# Altium PCB POWR0011_BCR_PROTOTYPE.PcbDoc (part 1 of 2)
Units mil, origin at the board's own origin, x right, y up, seen from the top; angles counter-clockwise.
Board outline 7874.02 x 3346.46 mil, 4 copper layers (Top Layer, Internal Plane 1, Internal Plane 2, Bottom Layer); 193 components, 127 nets, 685 pads, 316 vias.
Unrouted connection lines stored in the file: 1.
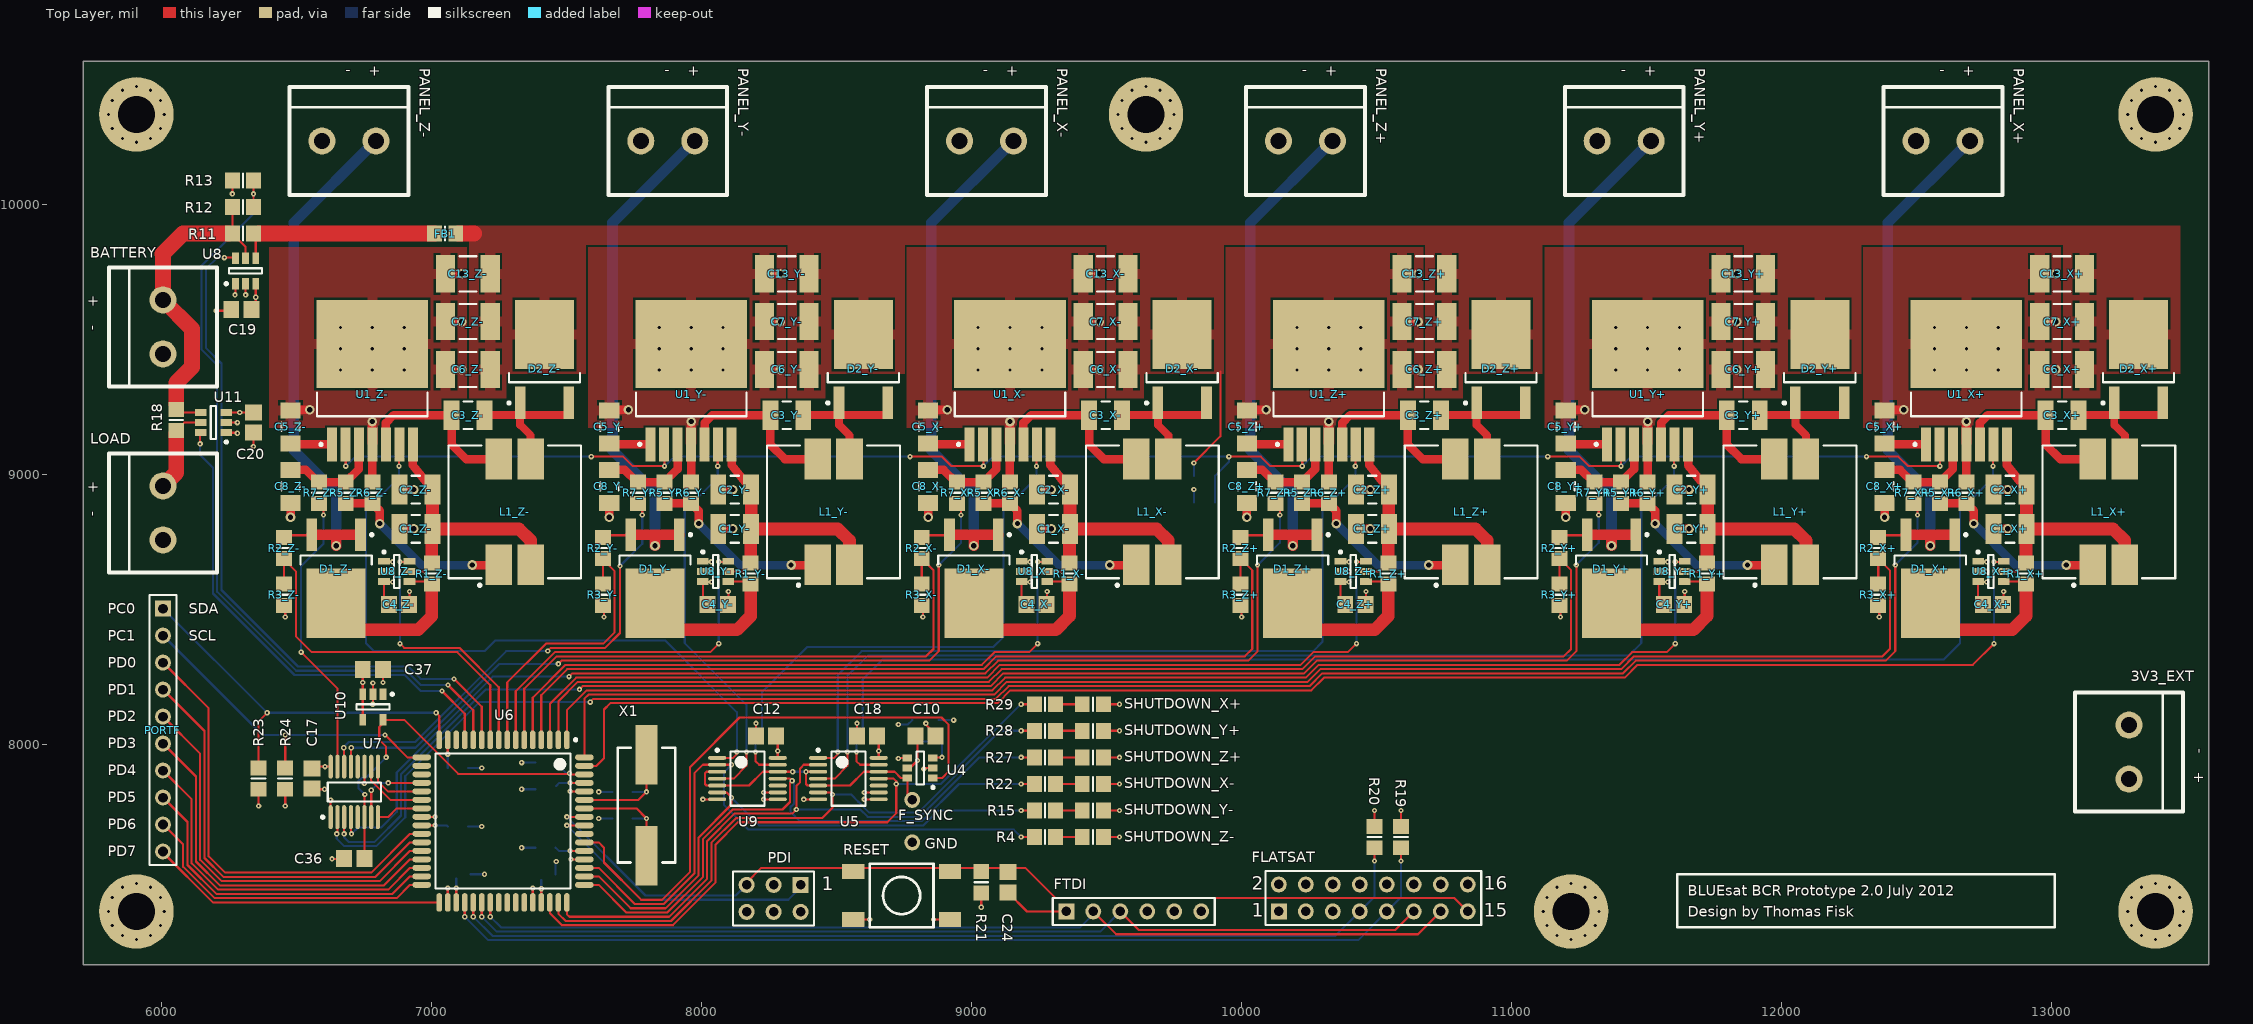
[diagram p0: Top Layer view]
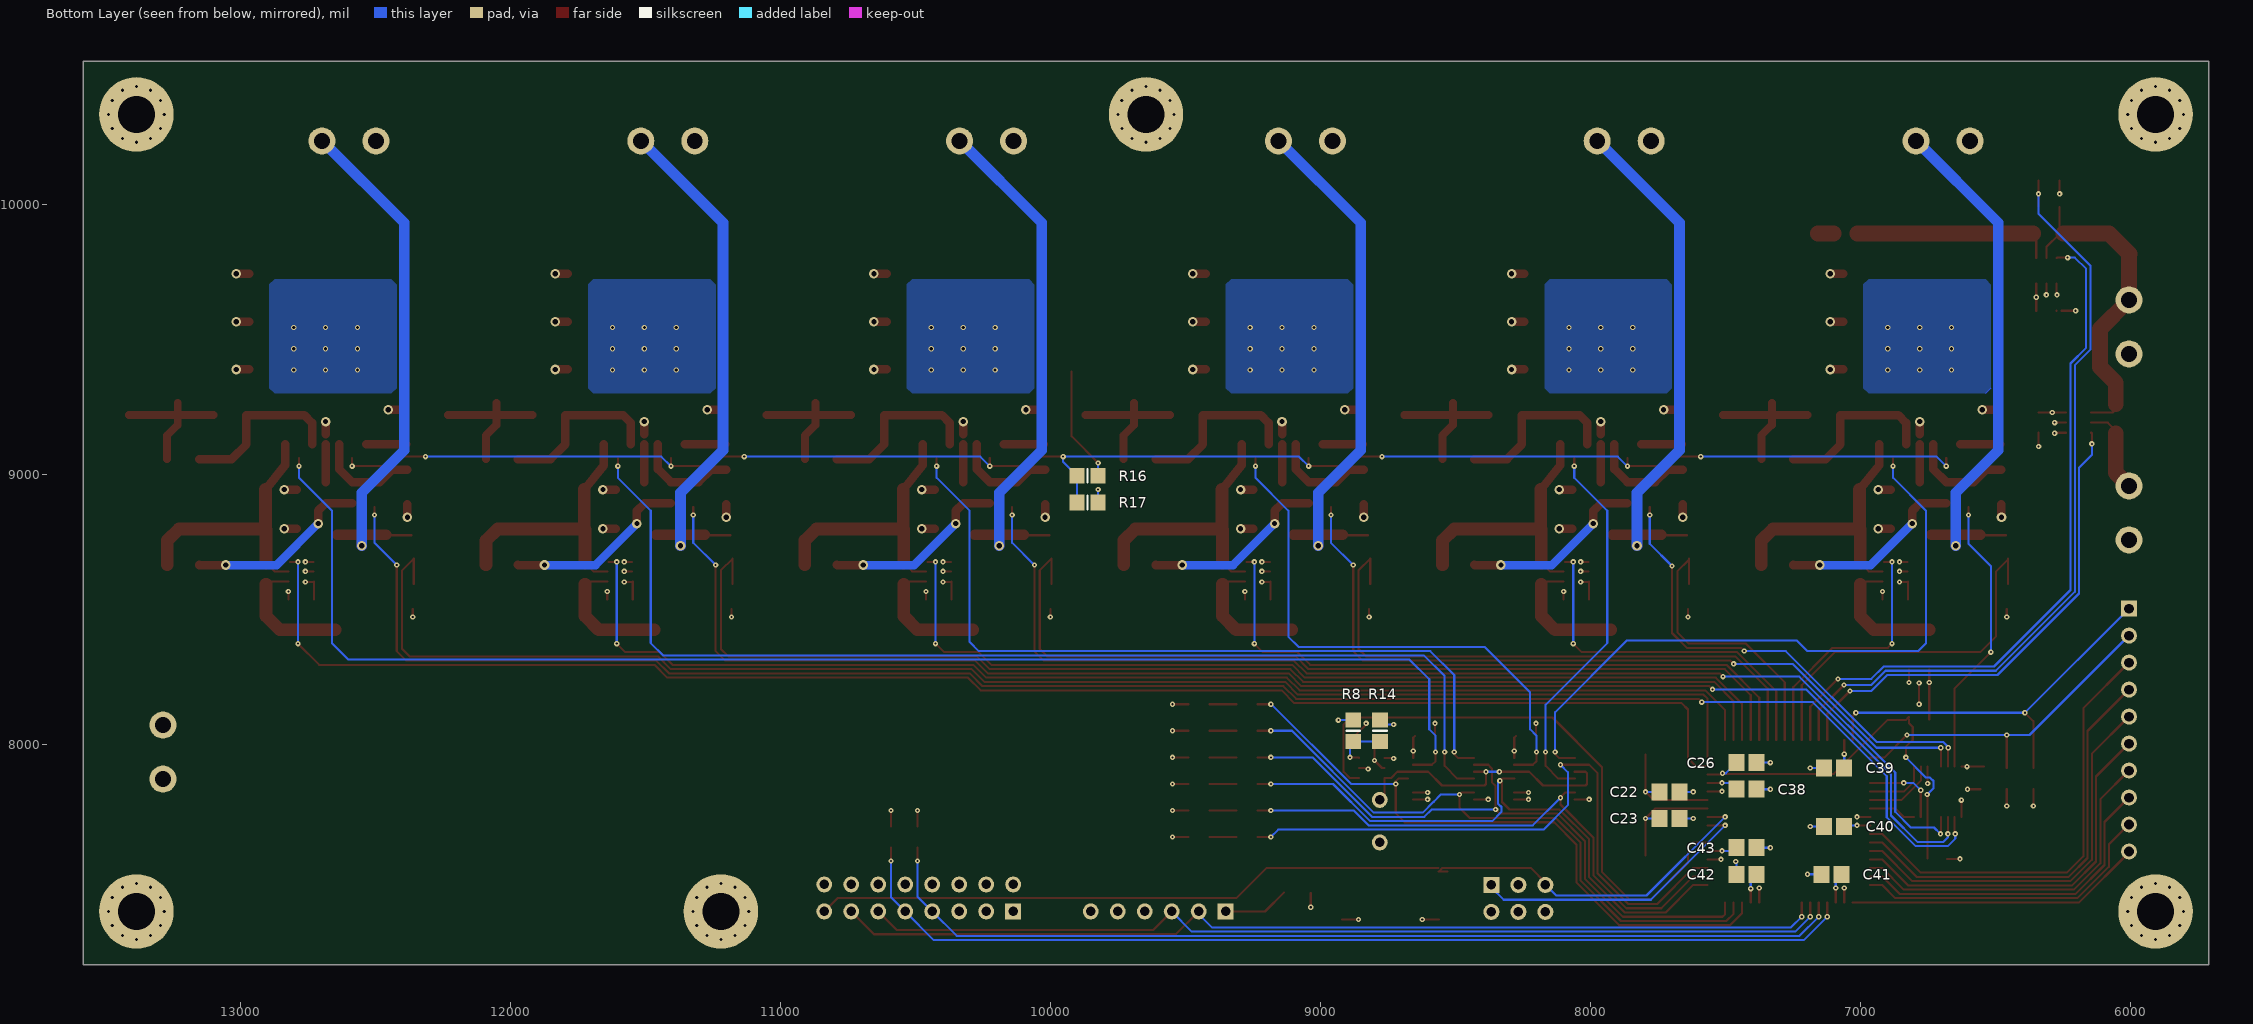
[diagram p1: Bottom Layer view, seen from below]
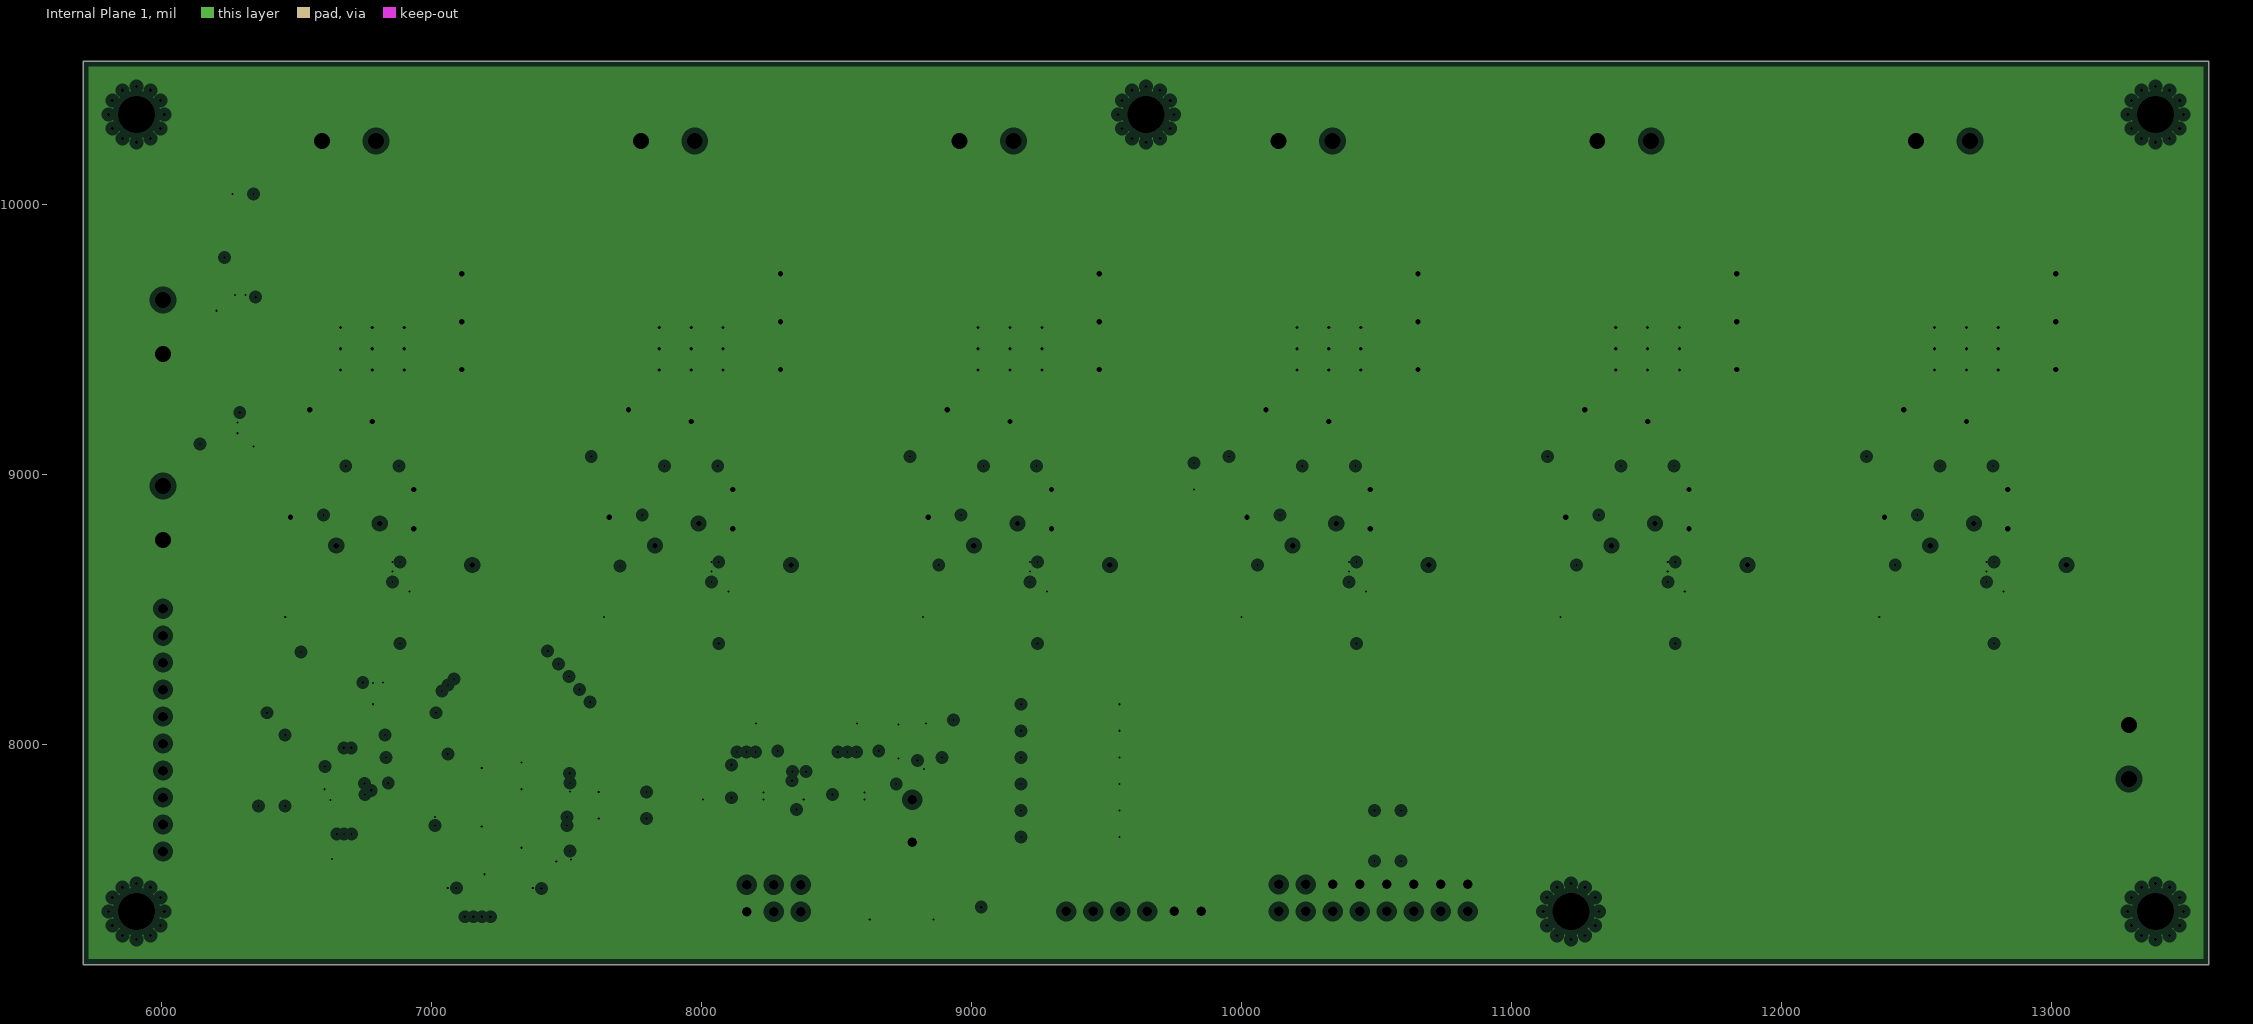
[diagram p2: Internal Plane 1, clearances drawn from the general rule]
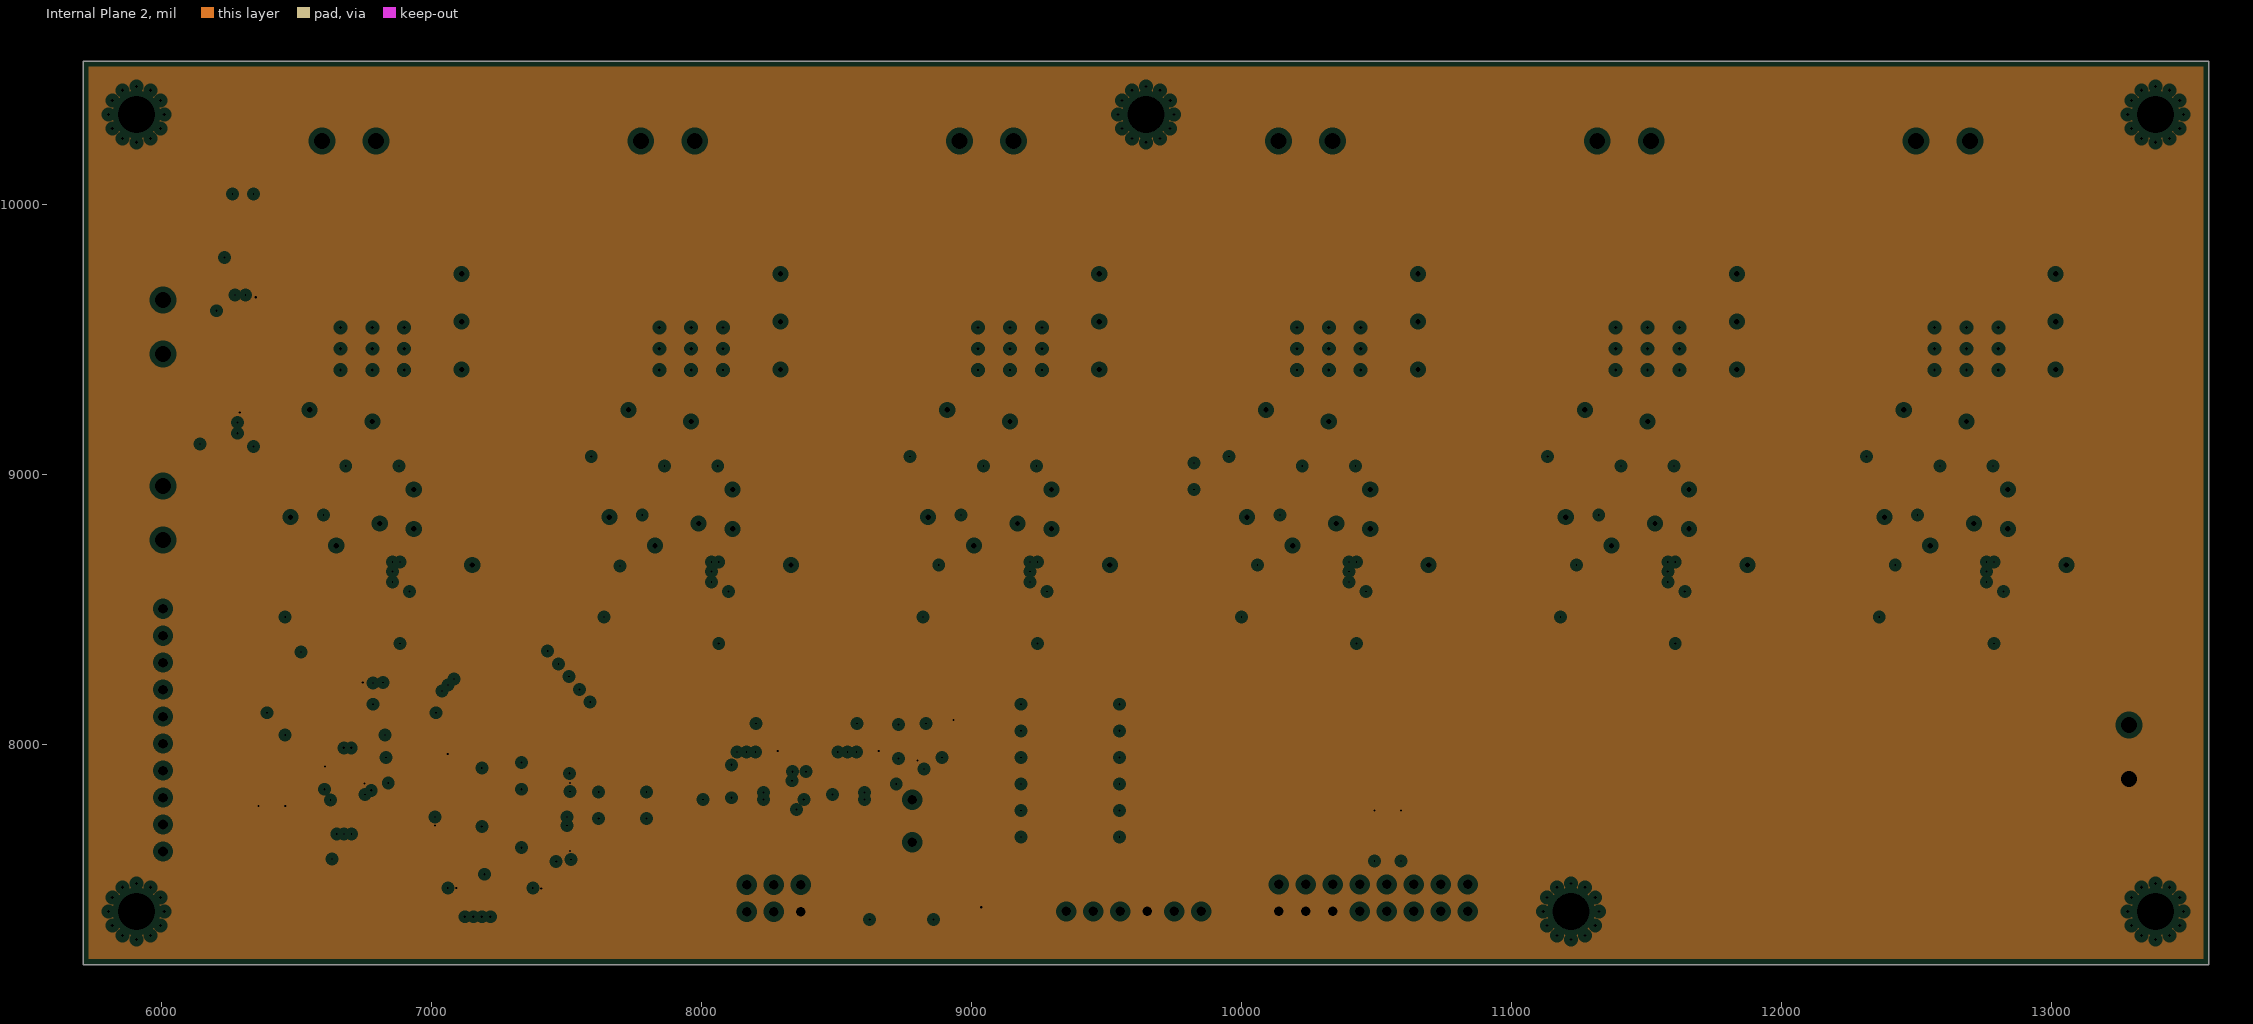
[diagram p3: Internal Plane 2, clearances drawn from the general rule]

## Layer stack, top to bottom
Top Layer: signal copper 1.4
Dielectric: core 12.6, FR-4, Dk 4.8
Internal Plane 1: plane copper 1.4, net GND
Dielectric: prepreg 12.6, FR-4, Dk 4.8
Internal Plane 2: plane copper 1.4, net 3V3
Dielectric: core 12.6, FR-4, Dk 4.8
Bottom Layer: signal copper 1.4

## Board outline
5708.66,10531.5 5708.66,7185.04 13582.68,7185.04 13582.68,10531.5

## Design rules (kind name [scope] priority, off if disabled: settings)
AssemblyTestPointUsage [All] p1 off:
AssemblyTestpoint [All] p1 off: testpointundercomponent=TRUE minsize=40 maxsize=100 preferedsize=60 minholesize=0 maxholesize=40 preferedholesize=32 testpointgrid=1 usegrid=TRUE gridtolerance=0.01 allowsidetop=TRUE allowsidebottom=TRUE
Clearance [All] p1: gap=7.87
FabricationTestPointUsage [All] p1 off: valid=0 allowmultiple=FALSE
FabricationTestpoint [All] p1 off: side=3 testpointundercomponent=TRUE minsize=40 maxsize=100 preferedsize=60 minholesize=0 maxholesize=40 preferedholesize=32 testpointgrid=1 allowsidetop=TRUE allowsidebottom=TRUE usegrid=TRUE gridtolerance=0.01
HoleSize [All] p1 off: absolutevalues=TRUE maxlimit=100 minlimit=1 maxpercent=80.000 minpercent=20.000
MinimumSolderMaskSliver [All] p1 off: minsoldermaskwidth=10
PlaneClearance [All] p1: clearance=20
PlaneConnect PlaneConnect_1 [IsVia] p1: planeconnectstyle=Direct reliefexpansion=20 reliefentries=4 reliefconductorwidth=10 reliefairgap=10
PlaneConnect [All] p2: planeconnectstyle=Relief reliefexpansion=20 reliefentries=4 reliefconductorwidth=10 reliefairgap=10
PolygonConnect PolygonConnect_1 [IsVia] p1: connectstyle=Direct reliefconductorwidth=10 reliefentries=4 polygonreliefangle="90 Angle"
PolygonConnect [All] p2: connectstyle=Relief reliefconductorwidth=39.37 reliefentries=4 polygonreliefangle="90 Angle"
RoomDefinition X+ [InComponentClass('X+')] p1: confinementstyle=ConfineIn formatcopy=TRUE lockcomponents=FALSE outline 12303.15,8366.14 13484.25,8366.14 13484.25,9842.52 12303.15,9842.52
RoomDefinition Y- [InComponentClass('Y-')] p2: confinementstyle=ConfineIn formatcopy=TRUE lockcomponents=FALSE outline 7578.74,8366.14 8759.84,8366.14 8759.84,9842.52 7578.74,9842.52
RoomDefinition Z- [InComponentClass('Z-')] p3: confinementstyle=ConfineIn formatcopy=TRUE lockcomponents=FALSE outline 6397.64,8366.14 7578.74,8366.14 7578.74,9842.52 6397.64,9842.52
RoomDefinition Z+ [InComponentClass('Z+')] p4: confinementstyle=ConfineIn formatcopy=TRUE lockcomponents=FALSE outline 9940.94,8366.14 11122.05,8366.14 11122.05,9842.52 9940.94,9842.52
RoomDefinition Y+ [InComponentClass('Y+')] p5: confinementstyle=ConfineIn formatcopy=TRUE lockcomponents=FALSE outline 11122.05,8366.14 12303.15,8366.14 12303.15,9842.52 11122.05,9842.52
RoomDefinition X- [InComponentClass('X-')] p6: confinementstyle=ConfineIn formatcopy=TRUE lockcomponents=FALSE outline 8759.84,8366.14 9940.94,8366.14 9940.94,9842.52 8759.84,9842.52
RoutingVias [All] p1: holewidth=7.87 width=13.78 viastyle="Through Hole" minholewidth=3.94 minwidth=3.94 maxholewidth=28 maxwidth=50
SilkToSilkClearance [All] p1 off: silktosilkclearance=10
SilkscreenOverComponentPads [All] p1 off: minsilkscreentomaskgap=10
SolderMaskExpansion [All] p1: expansion=4
Width [All] p1: maxlimit=157.48 minlimit=7.87 preferedwidth=7.87
18 further rules are at their usual default settings.

## Classes and differential pairs
component class U_POWR0008_BCR_System: C10 C12 C17 C18 C19 C20 C22 C23 C26 C36 C37 C38 C39 C40 C41 C42 C43 FB1 R8 R11 R12 R13 R14 R16 R17 R18 R19 R20 R23 R24 U4 U5 U6 U7 U8 U9 U10 U11 X1
component class POWR0010_BCR_TESTBOARD: 3V3_EXT BATTERY C24 FLATSAT FTDI LOAD PANEL_X+ PANEL_X- PANEL_Y+ PANEL_Y- PANEL_Z+ PANEL_Z- PORTF R4 R15 R21 R22 R27 R28 R29 RESET SHUTDOWN_X+ SHUTDOWN_X- SHUTDOWN_Y+ SHUTDOWN_Y- SHUTDOWN_Z+ SHUTDOWN_Z-
channel class POWR0001_BCR_LT1513: X+ X- Y+ Y- Z+ Z-
component class Z-: C1_Z- C2_Z- C3_Z- C4_Z- C5_Z- C6_Z- C7_Z- C8_Z- C13_Z- D1_Z- D2_Z- L1_Z- R1_Z- R2_Z- R3_Z- R5_Z- R6_Z- R7_Z- U1_Z- U8_Z-
component class Z+: C1_Z+ C2_Z+ C3_Z+ C4_Z+ C5_Z+ C6_Z+ C7_Z+ C8_Z+ C13_Z+ D1_Z+ D2_Z+ L1_Z+ R1_Z+ R2_Z+ R3_Z+ R5_Z+ R6_Z+ R7_Z+ U1_Z+ U8_Z+
component class Y-: C1_Y- C2_Y- C3_Y- C4_Y- C5_Y- C6_Y- C7_Y- C8_Y- C13_Y- D1_Y- D2_Y- L1_Y- R1_Y- R2_Y- R3_Y- R5_Y- R6_Y- R7_Y- U1_Y- U8_Y-
component class Y+: C1_Y+ C2_Y+ C3_Y+ C4_Y+ C5_Y+ C6_Y+ C7_Y+ C8_Y+ C13_Y+ D1_Y+ D2_Y+ L1_Y+ R1_Y+ R2_Y+ R3_Y+ R5_Y+ R6_Y+ R7_Y+ U1_Y+ U8_Y+
component class X-: C1_X- C2_X- C3_X- C4_X- C5_X- C6_X- C7_X- C8_X- C13_X- D1_X- D2_X- L1_X- R1_X- R2_X- R3_X- R5_X- R6_X- R7_X- U1_X- U8_X-
component class X+: C1_X+ C2_X+ C3_X+ C4_X+ C5_X+ C6_X+ C7_X+ C8_X+ C13_X+ D1_X+ D2_X+ L1_X+ R1_X+ R2_X+ R3_X+ R5_X+ R6_X+ R7_X+ U1_X+ U8_X+

## Components (designator, comment, footprint, x,y, rotation, side; value= is the part's Value field where it differs from the comment)
3V3_EXT "Screw Terminal" SCREW2 13287.4,7972.44 r90 top
BATTERY "Screw Terminal" SCREW2 6003.94,9547.24 r270 top
C1_X+ "Cap" CAPC3225M 12846.46,8799.21 r180 top (schematic designator C1)
C1_X- "Cap" CAPC3225M 9303.15,8799.21 r180 top (schematic designator C1)
C1_Y+ "Cap" CAPC3225M 11665.35,8799.21 r180 top (schematic designator C1)
C1_Y- "Cap" CAPC3225M 8122.05,8799.21 r180 top (schematic designator C1)
C1_Z+ "Cap" CAPC3225M 10484.25,8799.21 r180 top (schematic designator C1)
C1_Z- "Cap" CAPC3225M 6940.94,8799.21 r180 top (schematic designator C1)
C2_X+ "Cap" CAPC3225M 12846.46,8944.88 r180 top (schematic designator C2)
C2_X- "Cap" CAPC3225M 9303.15,8944.88 r180 top (schematic designator C2)
C2_Y+ "Cap" CAPC3225M 11665.35,8944.88 r180 top (schematic designator C2)
C2_Y- "Cap" CAPC3225M 8122.05,8944.88 r180 top (schematic designator C2)
C2_Z+ "Cap" CAPC3225M 10484.25,8944.88 r180 top (schematic designator C2)
C2_Z- "Cap" CAPC3225M 6940.94,8944.88 r180 top (schematic designator C2)
C3_X+ "Cap" CAPC3225M 13039.37,9220.47 r180 top (schematic designator C3)
C3_X- "Cap" CAPC3225M 9496.06,9220.47 r180 top (schematic designator C3)
C3_Y+ "Cap" CAPC3225M 11858.27,9220.47 r180 top (schematic designator C3)
C3_Y- "Cap" CAPC3225M 8314.96,9220.47 r180 top (schematic designator C3)
C3_Z+ "Cap" CAPC3225M 10677.17,9220.47 r180 top (schematic designator C3)
C3_Z- "Cap" CAPC3225M 7133.86,9220.47 r180 top (schematic designator C3)
C4_X+ "Cap" CAPC2012M 12783.46,8519.68 r0 top (schematic designator C4)
C4_X- "Cap" CAPC2012M 9240.16,8519.68 r0 top (schematic designator C4)
C4_Y+ "Cap" CAPC2012M 11602.36,8519.68 r0 top (schematic designator C4)
C4_Y- "Cap" CAPC2012M 8059.06,8519.68 r0 top (schematic designator C4)
C4_Z+ "Cap" CAPC2012M 10421.26,8519.68 r0 top (schematic designator C4)
C4_Z- "Cap" CAPC2012M 6877.95,8519.68 r0 top (schematic designator C4)
C5_X+ "Cap" CAPC3216M 12381.89,9177.17 r90 top (schematic designator C5)
C5_X- "Cap" CAPC3216M 8838.58,9177.17 r90 top (schematic designator C5)
C5_Y+ "Cap" CAPC3216M 11200.79,9177.17 r90 top (schematic designator C5)
C5_Y- "Cap" CAPC3216M 7657.48,9177.17 r90 top (schematic designator C5)
C5_Z+ "Cap" CAPC3216M 10019.69,9177.17 r90 top (schematic designator C5)
C5_Z- "Cap" CAPC3216M 6476.38,9177.17 r90 top (schematic designator C5)
C6_X+ "Cap" CAPC4532M 13039.37,9389.76 r180 top (schematic designator C6)
C6_X- "Cap" CAPC4532M 9496.06,9389.76 r180 top (schematic designator C6)
C6_Y+ "Cap" CAPC4532M 11858.27,9389.76 r180 top (schematic designator C6)
C6_Y- "Cap" CAPC4532M 8314.96,9389.76 r180 top (schematic designator C6)
C6_Z+ "Cap" CAPC4532M 10677.17,9389.76 r180 top (schematic designator C6)
C6_Z- "Cap" CAPC4532M 7133.86,9389.76 r180 top (schematic designator C6)
C7_X+ "Cap" CAPC4532M 13039.37,9566.93 r180 top (schematic designator C7)
C7_X- "Cap" CAPC4532M 9496.06,9566.93 r180 top (schematic designator C7)
C7_Y+ "Cap" CAPC4532M 11858.27,9566.93 r180 top (schematic designator C7)
C7_Y- "Cap" CAPC4532M 8314.96,9566.93 r180 top (schematic designator C7)
C7_Z+ "Cap" CAPC4532M 10677.17,9566.93 r180 top (schematic designator C7)
C7_Z- "Cap" CAPC4532M 7133.86,9566.93 r180 top (schematic designator C7)
C8_X+ "Cap" CAPC3216M 12381.89,8956.69 r90 top (schematic designator C8)
C8_X- "Cap" CAPC3216M 8838.58,8956.69 r90 top (schematic designator C8)
C8_Y+ "Cap" CAPC3216M 11200.79,8956.69 r90 top (schematic designator C8)
C8_Y- "Cap" CAPC3216M 7657.48,8956.69 r90 top (schematic designator C8)
C8_Z+ "Cap" CAPC3216M 10019.69,8956.69 r90 top (schematic designator C8)
C8_Z- "Cap" CAPC3216M 6476.38,8956.69 r90 top (schematic designator C8)
C10 "Cap" CAPC2012M 8828.74,8031.5 r0 top
C12 "Cap" CAPC2012M 8238.19,8031.5 r0 top
C13_X+ "Cap" CAPC4532M 13039.37,9744.09 r180 top (schematic designator C13)
C13_X- "Cap" CAPC4532M 9496.06,9744.09 r180 top (schematic designator C13)
C13_Y+ "Cap" CAPC4532M 11858.27,9744.09 r180 top (schematic designator C13)
C13_Y- "Cap" CAPC4532M 8314.96,9744.09 r180 top (schematic designator C13)
C13_Z+ "Cap" CAPC4532M 10677.17,9744.09 r180 top (schematic designator C13)
C13_Z- "Cap" CAPC4532M 7133.86,9744.09 r180 top (schematic designator C13)
C17 "Cap" CAPC2012M 6555.12,7874.02 r90 top
C18 "Cap" CAPC2012M 8612.2,8031.5 r0 top
C19 "Cap" CAPC2012M 6294.29,9612.2 r180 top
C20 "Cap" CAPC2012M 6338.58,9192.91 r270 top
C22 "Cap" CAPC2012M 7706.69,7824.8 r0 bottom
C23 "Cap" CAPC2012M 7706.69,7726.38 r180 bottom
C24 "Cap" CAPC2012M 9133.86,7490.16 r90 top
C26 "Cap" CAPC2012M 7421.26,7933.07 r0 bottom
C36 "Cap" CAPC2012M 6712.6,7578.74 r0 top
C37 "Cap" CAPC2012M 6781.5,8277.56 r180 top
C38 "Cap" CAPC2012M 7421.26,7834.65 r0 bottom
C39 "Cap" CAPC2012M 7096.46,7913.39 r180 bottom
C40 "Cap" CAPC2012M 7096.46,7696.85 r180 bottom
C41 "Cap" CAPC2012M 7106.3,7519.69 r180 bottom
C42 "Cap" CAPC2012M 7421.26,7519.69 r180 bottom
C43 "Cap" CAPC2012M 7421.26,7618.11 r0 bottom
D1_X+ "MBRD340G" TO229P990X238-3N 12551.18,8618.11 r270 top (schematic designator D1)
D1_X- "MBRD340G" TO229P990X238-3N 9007.87,8618.11 r270 top (schematic designator D1)
D1_Y+ "MBRD340G" TO229P990X238-3N 11370.08,8618.11 r270 top (schematic designator D1)
D1_Y- "MBRD340G" TO229P990X238-3N 7826.77,8618.11 r270 top (schematic designator D1)
D1_Z+ "MBRD340G" TO229P990X238-3N 10188.98,8618.11 r270 top (schematic designator D1)
D1_Z- "MBRD340G" TO229P990X238-3N 6645.67,8618.11 r270 top (schematic designator D1)
D2_X+ "MBRD340G" TO229P990X238-3N 13322.83,9425.2 r90 top (schematic designator D2)
D2_X- "MBRD340G" TO229P990X238-3N 9779.53,9425.2 r90 top (schematic designator D2)
D2_Y+ "MBRD340G" TO229P990X238-3N 12141.73,9425.2 r90 top (schematic designator D2)
D2_Y- "MBRD340G" TO229P990X238-3N 8598.43,9425.2 r90 top (schematic designator D2)
D2_Z+ "MBRD340G" TO229P990X238-3N 10960.63,9425.2 r90 top (schematic designator D2)
D2_Z- "MBRD340G" TO229P990X238-3N 7417.32,9425.2 r90 top (schematic designator D2)
FB1 "Res2" RESC2012M 7049.21,9892.72 r180 top
FLATSAT "Header 8X2" HDR2X8 10137.8,7381.89 r0 top
FTDI "Header 6" HDR1X6 9350.39,7381.89 r0 top
L1_X+ "DRQ125 Dual Inductor" DRQ125 13212.6,8862.2 r90 top (schematic designator L1)
L1_X- "DRQ125 Dual Inductor" DRQ125 9669.29,8862.2 r90 top (schematic designator L1)
L1_Y+ "DRQ125 Dual Inductor" DRQ125 12031.5,8862.2 r90 top (schematic designator L1)
L1_Y- "DRQ125 Dual Inductor" DRQ125 8488.19,8862.2 r90 top (schematic designator L1)
L1_Z+ "DRQ125 Dual Inductor" DRQ125 10850.39,8862.2 r90 top (schematic designator L1)
L1_Z- "DRQ125 Dual Inductor" DRQ125 7307.09,8862.2 r90 top (schematic designator L1)
LOAD "Screw Terminal" SCREW2 6003.94,8858.27 r270 top
PANEL_X+ "Solar Panel Connector" SCREW2 12598.43,10236.22 r180 top
PANEL_X- "Solar Panel Connector" SCREW2 9055.12,10236.22 r180 top
PANEL_Y+ "Solar Panel Connector" SCREW2 11417.32,10236.22 r180 top
PANEL_Y- "Solar Panel Connector" SCREW2 7874.02,10236.22 r180 top
PANEL_Z+ "Solar Panel Connector" SCREW2 10236.22,10236.22 r180 top
PANEL_Z- "Solar Panel Connector" SCREW2 6692.91,10236.22 r180 top
PDI "Header 3X2" HDR2X3 8366.14,7480.31 r180 top (schematic designator ICSP)
PORTF "Header 10" HDR1X10 6003.94,8503.94 r270 top
R1_X+ "Res1" RESC2012M 12905.51,8633.86 r270 top (schematic designator R1)
R1_X- "Res1" RESC2012M 9362.2,8633.86 r270 top (schematic designator R1)
R1_Y+ "Res1" RESC2012M 11724.41,8633.86 r270 top (schematic designator R1)
R1_Y- "Res1" RESC2012M 8181.1,8633.86 r270 top (schematic designator R1)
R1_Z+ "Res1" RESC2012M 10543.31,8633.86 r270 top (schematic designator R1)
R1_Z- "Res1" RESC2012M 7000,8633.86 r270 top (schematic designator R1)
R2_X+ "Res1" RESC2012M 12358.27,8728.35 r90 top (schematic designator R2)
R2_X- "Res1" RESC2012M 8814.96,8728.35 r90 top (schematic designator R2)
R2_Y+ "Res1" RESC2012M 11177.17,8728.35 r90 top (schematic designator R2)
R2_Y- "Res1" RESC2012M 7633.86,8728.35 r90 top (schematic designator R2)
R2_Z+ "Res1" RESC2012M 9996.06,8728.35 r90 top (schematic designator R2)
R2_Z- "Res1" RESC2012M 6452.76,8728.35 r90 top (schematic designator R2)
R3_X+ "Res1" RESC2012M 12358.27,8555.12 r90 top (schematic designator R3)
R3_X- "Res1" RESC2012M 8814.96,8555.12 r90 top (schematic designator R3)
R3_Y+ "Res1" RESC2012M 11177.17,8555.12 r90 top (schematic designator R3)
R3_Y- "Res1" RESC2012M 7633.86,8555.12 r90 top (schematic designator R3)
R3_Z+ "Res1" RESC2012M 9996.06,8555.12 r90 top (schematic designator R3)
R3_Z- "Res1" RESC2012M 6452.76,8555.12 r90 top (schematic designator R3)
R4 "Res1" RESC2012M 9271.65,7657.48 r180 top
R5_X+ "Res1" RESC2012M 12586.61,8933.07 r90 top (schematic designator R5)
R5_X- "Res1" RESC2012M 9043.31,8933.07 r90 top (schematic designator R5)
R5_Y+ "Res1" RESC2012M 11405.51,8933.07 r90 top (schematic designator R5)
R5_Y- "Res1" RESC2012M 7862.2,8933.07 r90 top (schematic designator R5)
R5_Z+ "Res1" RESC2012M 10224.41,8933.07 r90 top (schematic designator R5)
R5_Z- "Res1" RESC2012M 6681.1,8933.07 r90 top (schematic designator R5)
R6_X+ "Res1" RESC2012M 12685.04,8933.07 r270 top (schematic designator R6)
R6_X- "Res1" RESC2012M 9141.73,8933.07 r270 top (schematic designator R6)
R6_Y+ "Res1" RESC2012M 11503.94,8933.07 r270 top (schematic designator R6)
R6_Y- "Res1" RESC2012M 7960.63,8933.07 r270 top (schematic designator R6)
R6_Z+ "Res1" RESC2012M 10322.83,8933.07 r270 top (schematic designator R6)
R6_Z- "Res1" RESC2012M 6779.53,8933.07 r270 top (schematic designator R6)
R7_X+ "Res1" RESC2012M 12488.19,8933.07 r270 top (schematic designator R7)
R7_X- "Res1" RESC2012M 8944.88,8933.07 r270 top (schematic designator R7)
R7_Y+ "Res1" RESC2012M 11307.09,8933.07 r270 top (schematic designator R7)
R7_Y- "Res1" RESC2012M 7763.78,8933.07 r270 top (schematic designator R7)
R7_Z+ "Res1" RESC2012M 10125.98,8933.07 r270 top (schematic designator R7)
R7_Z- "Res1" RESC2012M 6582.68,8933.07 r270 top (schematic designator R7)
R8 "Res1" RESC2012M 8877.95,8051.18 r270 bottom
R11 "0805 Resistor" RESC2012M 6300.2,9892.72 r180 top
R12 "Res1" RESC2012M 6300.2,9991.14 r0 top
R13 "Res1" RESC2012M 6300.2,10089.57 r180 top
R14 "Res1" RESC2012M 8779.53,8051.18 r270 bottom
R15 "Res1" RESC2012M 9271.65,7755.91 r180 top
R16 "Res1" RESC2012M 9862.2,8996.06 r180 bottom
R17 "Res1" RESC2012M 9862.2,8897.64 r0 bottom
R18 "0805 Resistor" RESC2012M 6053.15,9202.76 r90 top
R19 "Res1" RESC2012M 10590.55,7657.48 r270 top
R20 "Res1" RESC2012M 10492.13,7657.48 r270 top
R21 "Res1" RESC2012M 9035.43,7490.16 r90 top
R22 "Res1" RESC2012M 9271.65,7854.33 r180 top
R23 "Res1" RESC2012M 6358.27,7874.02 r90 top
R24 "Res1" RESC2012M 6456.69,7874.02 r90 top
R27 "Res1" RESC2012M 9271.65,7952.76 r180 top
R28 "Res1" RESC2012M 9271.65,8051.18 r180 top
R29 "Res1" RESC2012M 9271.65,8149.61 r180 top
RESET "SW-PB" "RESET SWITCH" 8740.16,7440.94 r90 top (schematic designator S1)
SHUTDOWN_X+ "8V0_RX2" 6-0805_M 9448.82,8149.61 r0 top
SHUTDOWN_X- "VVAR_TX1" 6-0805_M 9448.82,7854.33 r0 top
SHUTDOWN_Y+ "VVAR_TX1" 6-0805_M 9448.82,8051.18 r0 top
SHUTDOWN_Y- "8V0_RX2" 6-0805_M 9448.82,7755.91 r0 top
SHUTDOWN_Z+ "8V0_RX2" 6-0805_M 9448.82,7952.76 r0 top
SHUTDOWN_Z- "VVAR_TX1" 6-0805_M 9448.82,7657.48 r0 top
U1_X+ "LT1513-2" LT1513-2_TO127P1420-8N 12685.04,9348.43 r90 top (schematic designator U1)
U1_X- "LT1513-2" LT1513-2_TO127P1420-8N 9141.73,9348.43 r90 top (schematic designator U1)
U1_Y+ "LT1513-2" LT1513-2_TO127P1420-8N 11503.94,9348.43 r90 top (schematic designator U1)
U1_Y- "LT1513-2" LT1513-2_TO127P1420-8N 7960.63,9348.43 r90 top (schematic designator U1)
U1_Z+ "LT1513-2" LT1513-2_TO127P1420-8N 10322.83,9348.43 r90 top (schematic designator U1)
U1_Z- "LT1513-2" LT1513-2_TO127P1420-8N 6779.53,9348.43 r90 top (schematic designator U1)
U4 "LTC6990MP" SOT26A-6L 8809.06,7913.39 r180 top
U5 "SN74HC02PWLE" TSOP65P640-14AN 8543.31,7874.02 r0 top
U6 "ATxmega64A3-AU" 64A_N 7263.78,7716.54 r270 top
U7 "LTC1660IGN" SOP635P600-16N 6712.6,7824.8 r90 top
U8 "ADM4073" SOT26A-6N 6310.04,9754.92 r90 top
U8_X+ "ADM4073" SOT26A-6N 12775.59,8641.73 r0 top (schematic designator U8)
U8_X- "ADM4073" SOT26A-6N 9232.28,8641.73 r0 top (schematic designator U8)
U8_Y+ "ADM4073" SOT26A-6N 11594.49,8641.73 r0 top (schematic designator U8)
U8_Y- "ADM4073" SOT26A-6N 8051.18,8641.73 r0 top (schematic designator U8)
U8_Z+ "ADM4073" SOT26A-6N 10413.39,8641.73 r0 top (schematic designator U8)
U8_Z- "ADM4073" SOT26A-6N 6870.08,8641.73 r0 top (schematic designator U8)
U9 "SN74HC02PWLE" TSOP65P640-14AN 8169.29,7874.02 r0 top
U10 "LM4120AIM5-2.0" MF05A_N 6781.5,8139.76 r270 top
U11 "ADM4073" SOT26A-6N 6190.94,9192.91 r180 top
X1 "8MHz" "HC49 - No border" 7795.28,7775.59 r270 top
? "" HOLE3.5 11220.47,7381.89 r0 top
? "" HOLE3.5 13385.83,7381.89 r0 top
? "" HOLE3.5 13385.83,10334.65 r0 top
? "" HOLE3.5 9645.67,10334.65 r0 top
? "" HOLE3.5 5905.51,10334.65 r0 top
? "" HOLE3.5 5905.51,7381.89 r0 top

## Footprints (in the part's own frame and the unit in brackets; to place one, negate y for a bottom-side part, rotate by r counter-clockwise, add the part's x,y. Pads: shape width x height; smd on the part's side, far side on the other; paste and mask are expansions set on the pad)
6-0805_M [mm] "Chip Resistor, Body 2.0x1.2mm, IPC Low Density"
  rect 1.4x1.5 smd: 1(-1,0) 2(1,0)
  silkscreen extent 0,-0.65 0,0.65, body extent -1.07,-0.7 1.07,0.7, height 0.7
64A_N [mm] "Thin QFP, 64-Leads, Body 14x14mm, Pitch 0.8mm, IPC Medium Density"
  oval 1.75x0.55 smd: 1(-7.65,6) 2(-7.65,5.2) 3(-7.65,4.4) 4(-7.65,3.6) 5(-7.65,2.8) 6(-7.65,2) 7(-7.65,1.2) 8(-7.65,0.4) 9(-7.65,-0.4) 10(-7.65,-1.2) 11(-7.65,-2) 12(-7.65,-2.8) 13(-7.65,-3.6) 14(-7.65,-4.4) 15(-7.65,-5.2) 16(-7.65,-6) 33(7.65,-6) 34(7.65,-5.2) 35(7.65,-4.4) 36(7.65,-3.6) 37(7.65,-2.8) 38(7.65,-2) 39(7.65,-1.2) 40(7.65,-0.4) 41(7.65,0.4) 42(7.65,1.2) 43(7.65,2) 44(7.65,2.8) 45(7.65,3.6) 46(7.65,4.4) 47(7.65,5.2) 48(7.65,6)
  oval 0.55x1.75 smd: 17(-6,-7.65) 18(-5.2,-7.65) 19(-4.4,-7.65) 20(-3.6,-7.65) 21(-2.8,-7.65) 22(-2,-7.65) 23(-1.2,-7.65) 24(-0.4,-7.65) 25(0.4,-7.65) 26(1.2,-7.65) 27(2,-7.65) 28(2.8,-7.65) 29(3.6,-7.65) 30(4.4,-7.65) 31(5.2,-7.65) 32(6,-7.65) 49(6,7.65) 50(5.2,7.65) 51(4.4,7.65) 52(3.6,7.65) 53(2.8,7.65) 54(2,7.65) 55(1.2,7.65) 56(0.4,7.65) 57(-0.4,7.65) 58(-1.2,7.65) 59(-2,7.65) 60(-2.8,7.65) 61(-3.6,7.65) 62(-4.4,7.65) 63(-5.2,7.65) 64(-6,7.65)
  silkscreen extent -7.77,-6.35 6.35,6.95, body extent -7,-7 7,7, height 1.2
CAPC2012M [mm] "Chip Capacitor, Body 2.0x1.3mm, IPC Low Density"
  rect 1.5x1.6 smd: 1(-0.95,0) 2(0.95,0)
  body extent -1.1,-0.72 1.1,0.72, height 1.1
CAPC3216M [mm] "Chip Capacitor, Body 3.2x1.6mm, IPC Low Density"
  rect 1.5x1.9 smd: 1(-1.55,0) 2(1.55,0)
  silkscreen extent -0.4,-0.85 0.4,0.85, body extent -1.7,-0.9 1.7,0.9, height 1.35
CAPC3225M [mm] "Chip Capacitor, Body 3.2x2.5mm, IPC Low Density"
  rect 1.5x2.8 smd: 1(-1.55,0) 2(1.55,0)
  silkscreen extent -0.4,-1.3 0.4,1.3, body extent -1.7,-1.35 1.7,1.35, height 1.35
CAPC4532M [mm] "Chip Capacitor, Body 4.5x3.2mm, IPC Low Density"
  rect 1.8x3.5 smd: 1(-2.1,0) 2(2.1,0)
  silkscreen extent -0.8,-1.65 0.8,1.65, body extent -2.4,-1.7 2.4,1.7, height 1.35
DRQ125 [mm]
  rect 3.85x2.5 smd: 1(-4.975,1.5) 2(-4.975,-1.5) 3(4.975,-1.5) 4(4.975,1.5)
  silkscreen extent -7.02,-6.25 6.25,6.25, body extent -6.25,-6.25 6.25,6.25, height 6
"HC49 - No border" [mm] "Crystal Oscilator"
  rect 5.6x2.1 smd: 1(-4.75,0) 2(4.75,0)
  silkscreen extent -5.4,-2.7 5.4,2.7, body extent -5.4,-2.7 5.4,2.7, height 4.2
HDR1X6 [mm] "Connector; Header; 6 Position"
  rect 1.5x1.5 hole 0.9: 1(0,0)
  round 1.5 hole 0.9: 2(2.54,0) 3(5.08,0) 4(7.62,0) 5(10.16,0) 6(12.7,0)
  silkscreen extent -1.27,-1.27 13.97,1.27
HDR1X10 [mm] "Connector; Header; 10 Position"
  rect 1.5x1.5 hole 0.9: 1(0,0)
  round 1.5 hole 0.9: 2(2.54,0) 3(5.08,0) 4(7.62,0) 5(10.16,0) 6(12.7,0) 7(15.24,0) 8(17.78,0) 9(20.32,0) 10(22.86,0)
  silkscreen extent -1.27,-1.27 24.13,1.27
HDR2X3 [mm] "Connector; Header; 3x2 Position"
  rect 1.5x1.5 hole 0.9: 1(0,0)
  round 1.5 hole 0.9: 2(0,2.54) 3(2.54,0) 4(2.54,2.54) 5(5.08,0) 6(5.08,2.54)
  silkscreen extent -1.27,-1.27 6.35,3.81
HDR2X8 [mm] "Connector; Header; 8x2 Position"
  rect 1.5x1.5 hole 0.9: 1(0,0)
  round 1.5 hole 0.9: 2(0,2.54) 3(2.54,0) 4(2.54,2.54) 5(5.08,0) 6(5.08,2.54) 7(7.62,0) 8(7.62,2.54) 9(10.16,0) 10(10.16,2.54) 11(12.7,0) 12(12.7,2.54) 13(15.24,0) 14(15.24,2.54) 15(17.78,0) 16(17.78,2.54)
  silkscreen extent -1.27,-1.27 19.05,3.81
HOLE3.5 [mm]
  round 1 hole 0.3: 1(-2.625,0) 1(-2.273,-1.312) 1(-2.273,1.312) 1(-1.312,2.273) 1(-1.312,-2.273) 1(0,-2.625) 1(0,2.625) 1(1.312,-2.273) 1(1.312,2.273) 1(2.273,-1.312) 1(2.273,1.312) 1(2.625,0)
  round 7 hole 3.5: 1(0,0)
LT1513-2_TO127P1420-8N [mm] "D2-PAK, 8-Leads, Body 8.9x10.1mm, Pitch 1.27mm, Lead Span 14.2mm, IPC Medium Density"
  rect 3.2x0.95 smd: 1(-6,3.81) 2(-6,2.54) 3(-6,1.27) 4(-6,0) 5(-6,-1.27) 6(-6,-2.54) 7(-6,-3.81)
  rect 8.3x10.5 smd: 8(3.45,0)
  silkscreen extent -6.12,-5.2 -1.1,5.2, body extent -3.35,-5.2 6.05,5.2, height 4.65
MF05A_N [mm] "SOT23, 5-Leads, Body 2.9x1.6mm, Pitch 0.95mm, Lead Span 2.8mm, IPC Medium Density"
  rect 1.1x0.65 smd: 1(-1.2,0.95) 2(-1.2,0) 3(-1.2,-0.95) 4(1.2,-0.95) 5(1.2,0.95)
  silkscreen extent -1.32,-1.55 0.25,1.95, body extent -0.9,-1.55 0.9,1.55, height 1.19
RESC2012M [mm] "Chip Resistor, Body 2.0x1.3mm, IPC Low Density"
  rect 1.4x1.5 smd: 1(-1,0) 2(1,0)
  silkscreen extent 0,-0.65 0,0.65, body extent -1.07,-0.7 1.07,0.7, height 0.65
"RESET SWITCH" [mm]
  rect 1.4x2.1 smd: 1(-2.25,4.55) 1(-2.25,-4.55) 2(2.25,4.55) 2(2.25,-4.55)
  silkscreen extent -3,-3 3,3
SCREW2 [mm]
  round 2.54 hole 1.5: 1(-2.54,0) 2(2.54,0)
  silkscreen extent -5.59,-5.08 5.59,5.08
SOP635P600-16N [mm] "SOP, 16-Leads, Body 4.9x3.9mm, Pitch 0.635mm, IPC Medium Density"
  oval 2.25x0.4 smd: 1(-2.375,2.222) 2(-2.375,1.587) 3(-2.375,0.952) 4(-2.375,0.317) 5(-2.375,-0.318) 6(-2.375,-0.953) 7(-2.375,-1.588) 8(-2.375,-2.222) 9(2.375,-2.222) 10(2.375,-1.587) 11(2.375,-0.952) 12(2.375,-0.317) 13(2.375,0.318) 14(2.375,0.953) 15(2.375,1.588) 16(2.375,2.222)
  silkscreen extent -2.5,-2.5 0.9,3.1, body extent -1.99,-2.5 1.99,2.5, height 1.76
SOT26A-6L [mm] "SOT23, 6-Leads, Body 2.9x1.7mm, Pitch 0.95mm, Lead Span 2.8mm, IPC High Density"
  rect 0.9x0.65 smd: 1(-1.2,0.95) 2(-1.2,0) 3(-1.2,-0.95) 4(1.2,-0.95) 5(1.2,0) 6(1.2,0.95)
  silkscreen extent -1.33,-1.55 0.35,1.95, body extent -0.9,-1.55 0.9,1.55, height 1.45
SOT26A-6N [mm] "SOT23, 6-Leads, Body 2.9x1.7mm, Pitch 0.95mm, Lead Span 2.8mm, IPC Medium Density"
  rect 1.1x0.65 smd: 1(-1.2,0.95) 2(-1.2,0) 3(-1.2,-0.95) 4(1.2,-0.95) 5(1.2,0) 6(1.2,0.95)
  silkscreen extent -1.32,-1.55 0.25,1.95, body extent -0.9,-1.55 0.9,1.55, height 1.45
TO229P990X238-3N [mm] "D-PAK, 3-Pads, Body 6.2x6.7mm (max), IPC Medium Density"
  rect 3.05x1 smd: 1(-4.05,2.29) 1(-4.05,-2.29)
  rect 6.5x5.55 smd: 2(2.4,0)
  silkscreen extent -4.17,-3.35 -1.25,3.47, body extent -2.1,-3.37 4.12,3.37, height 2.38
TSOP65P640-14AN [mm] "TSOP, 14-Leads, Body 5x4.4mm, Pitch 0.65mm, IPC Medium Density"
  oval 1.7x0.35 smd: 1(-2.85,1.95) 2(-2.85,1.3) 3(-2.85,0.65) 4(-2.85,0) 5(-2.85,-0.65) 6(-2.85,-1.3) 7(-2.85,-1.95) 8(2.85,-1.95) 9(2.85,-1.3) 10(2.85,-0.65) 11(2.85,0) 12(2.85,0.65) 13(2.85,1.3) 14(2.85,1.95)
  silkscreen extent -2.97,-2.55 1.6,2.8, body extent -2.25,-2.55 2.25,2.55, height 1.2

## Part data
3V3_EXT BATTERY LOAD: library part "Header 2", "Header, 2-Pin"
C1_X+ C1_X- C1_Y+ C1_Y- C1_Z+ C1_Z- C2_X+ C2_X- C2_Y+ C2_Y- C2_Z+ C2_Z- C3_X+ C3_X- C3_Y+ C3_Y- C3_Z+ C3_Z- C4_X+ C4_X- C4_Y+ C4_Y- C4_Z+ C4_Z- C5_X+ C5_X- C5_Y+ C5_Y- C5_Z+ C5_Z- C6_X+ C6_X- C6_Y+ C6_Y- C6_Z+ C6_Z- C7_X+ C7_X- C7_Y+ C7_Y- C7_Z+ C7_Z- C8_X+ C8_X- C8_Y+ C8_Y- C8_Z+ C8_Z- C10 C12 C13_X+ C13_X- C13_Y+ C13_Y- C13_Z+ C13_Z- C17 C18 C19 C20 C22 C23 C24 C26 C36 C37 C38 C39 C40 C41 C42 C43: "Capacitor"
D1_X+ D1_X- D1_Y+ D1_Y- D1_Z+ D1_Z- D2_X+ D2_X- D2_Y+ D2_Y- D2_Z+ D2_Z-: library part "Diode 11DQ03", "Schottky Rectifier"
FB1 R1_X+ R1_X- R1_Y+ R1_Y- R1_Z+ R1_Z- R2_X+ R2_X- R2_Y+ R2_Y- R2_Z+ R2_Z- R3_X+ R3_X- R3_Y+ R3_Y- R3_Z+ R3_Z- R4 R5_X+ R5_X- R5_Y+ R5_Y- R5_Z+ R5_Z- R6_X+ R6_X- R6_Y+ R6_Y- R6_Z+ R6_Z- R7_X+ R7_X- R7_Y+ R7_Y- R7_Z+ R7_Z- R8 R12 R13 R14 R15 R16 R17 R19 R20 R21 R22 R23 R24 R27 R28 R29: "Resistor"
FLATSAT: "Header, 8-Pin, Dual row"
FTDI: "Header, 6-Pin"
PDI: "Header, 3-Pin, Dual row"
PORTF: "Header, 10-Pin"
R11 R18: library part Res1, "Resistor"
RESET: "Switch"
SHUTDOWN_X+ SHUTDOWN_X- SHUTDOWN_Y+ SHUTDOWN_Y- SHUTDOWN_Z+ SHUTDOWN_Z-: library part LED0, "Typical INFRARED GaAs LED"
U5 U9: "Quadruple 2-Input Positive-NOR Gate"
U6: "8/16-bit AVR XMEGA A3 Microcontroller, 1.6-3.6V, 32MHz, 64KB + 4KB Flash, 2KB EEPROM, 4KB SRAM, 64-pin TQFP, Industrial Grade (-40°C to 85°C), Pb-Free"
U8 U8_X+ U8_X- U8_Y+ U8_Y- U8_Z+ U8_Z- U11: "Current Sense Amplifer"
U10: "Precision Micropower Low Dropout Voltage Reference"
X1: library part XTAL, "Crystal Oscillator"

## Free pads (board coordinates)
  round 59.06 hole 35.43: 0(8779.53,7637.8) 0(8779.53,7795.28)

## Via types
v1: diameter 19.68, hole 7.87, Top Layer to Bottom Layer, tented both sides, 194 vias
v2: diameter 35.43, hole 19.68, Top Layer to Bottom Layer, tented both sides, 66 vias
v3: diameter 19.68, hole 11.81, Top Layer to Bottom Layer, tented bottom, 54 vias
v4: diameter 19.68, hole 7.87, Top Layer to Bottom Layer, 2 vias

## Nets (pads, with @x,y where several pads share a name; then routed paths per layer and width w, separated by ;. In a path a pad name is that pad's centre, name@x,y a point inside that pad or via, vN(x,y) a via of type N, cw(c..) or ccw(c..) an arc to the next point about the centre after c; other vN are vias at no path point)
3V3: 3V3_EXT.1 C10.1 C12.2 C17.2 C18.2 C19.1 C20.1 C37.2 C38.2 C39.2 C40.2 C41.2 C42.2 C43.2 FLATSAT.1 FLATSAT.3 FLATSAT.5 FTDI.4 PDI.2 R8.1 R19.1 R20.1 R21.1 R23.1 R24.1 U4.5 U5.14 U6.15 U6.25 U6.35 U6.45 U6.53 U6.61 U7.11 U7.16 U8.3 U9.14 U10.3 U10.4 U11.3 | length 1784.1
  Top Layer w7.87: U11.3@6238.19,9230.31 v1(6288.39,9230.31) C20.1@6338.58,9230.31 ; C19.1@6347.44,9607.28 v1(6347.44,9657.48) U8.3@6347.44,9707.68 ; v1(6358.27,7772.64) R23.1@6358.27,7834.65 ; v1(6456.69,7772.64) R24.1@6456.69,7834.65 ; C17.2@6542.32,7918.31 v1(6604.33,7918.31) U7.16@6625.1,7918.31 ; U10.4@6744.09,8092.52 U10.3@6744.09,8187.01 v1(6744.09,8230.32) C37.2@6744.09,8277.56 ; v1(6750.1,7856.2) U7.11@6750.1,7918.31 ; U6.25@6962.6,7700.79 v1(7011.81,7700.79) ; v1(7059.06,7964.57) U6.15@7059.06,8017.72 ; U6.35@7090.55,7415.35 v1(7090.55,7468.5) ; U6.45@7405.51,7415.35 v1(7405.51,7466.54) ; v1(7511.81,7606.3) U6.53@7564.96,7606.3 ; v1(7511.81,7858.27) U6.61@7564.96,7858.27 ; C12.2@8275.59,8031.5 8281.5,8025.59 v1(8281.5,7976.38) U9.14@8281.5,7950.79 ; C18.2@8649.61,8031.5 8655.51,8025.59 v1(8655.51,7976.38) U5.14@8655.51,7950.79 ; U4.5@8761.81,7913.39 8771.62,7913.39 v1(8799.21,7940.97) 8799.21,8023.62 C10.1@8791.34,8031.5 ; v1(9035.43,7397.64) R21.1@9035.43,7450.79 ; R20.1@10492.13,7696.85 v1(10492.13,7755.91) ; R19.1@10590.55,7696.85 v1(10590.55,7755.91)
  Bottom Layer w7.87: v1(7011.81,7700.79) 7055.12,7700.79 C40.2@7059.06,7696.85 ; C39.2@7059.06,7913.39 v1(7059.06,7964.57) ; v1(7090.55,7468.5) C41.2@7090.55,7503.94 ; v1(7405.51,7466.54) C42.2@7405.51,7498.03 ; C43.2@7458.66,7618.11 7470.47,7606.3 v1(7511.81,7606.3) ; C38.2@7460.63,7846.46 7472.44,7858.27 v1(7511.81,7858.27) ; R8.1@8877.95,8090.55 v1(8933.07,8090.55)
3V3_X+: C4_X+.1 U8_X+.3 | length 96.5
  Top Layer w7.87: C4_X+.1@12728.35,8537.4 U8_X+.3@12728.35,8604.33 ; U8_X+.3@12730.32,8602.36 v1(12759.84,8602.36)
3V3_X-: C4_X-.1 U8_X-.3 | length 96.5
  Top Layer w7.87: C4_X-.1@9185.04,8537.4 U8_X-.3@9185.04,8604.33 ; U8_X-.3@9187.01,8602.36 v1(9216.54,8602.36)
3V3_Y+: C4_Y+.1 U8_Y+.3 | length 96.5
  Top Layer w7.87: C4_Y+.1@11547.24,8537.4 U8_Y+.3@11547.24,8604.33 ; U8_Y+.3@11549.21,8602.36 v1(11578.74,8602.36)
3V3_Y-: C4_Y-.1 U8_Y-.3 | length 96.5
  Top Layer w7.87: C4_Y-.1@8003.94,8537.4 U8_Y-.3@8003.94,8604.33 ; U8_Y-.3@8005.91,8602.36 v1(8035.43,8602.36)
3V3_Z+: C4_Z+.1 U8_Z+.3 | length 96.5
  Top Layer w7.87: C4_Z+.1@10366.14,8537.4 U8_Z+.3@10366.14,8604.33 ; U8_Z+.3@10368.11,8602.36 v1(10397.64,8602.36)
3V3_Z-: C4_Z-.1 U8_Z-.3 | length 96.5
  Top Layer w7.87: C4_Z-.1@6822.83,8537.4 U8_Z-.3@6822.83,8604.33 ; U8_Z-.3@6824.8,8602.36 v1(6854.33,8602.36)
BAT: BATTERY.1 R11.2 R12.1 R18.2 U8.5 U11.4 | length 1205.7
  Top Layer w7.87: R18.2@6053.15,9261.81 R18.2@6053.15,9242.13 6064.96,9230.31 U11.4@6143.7,9230.31 ; R11.2@6260.83,9892.72 6310.04,9843.5 U8.5@6310.04,9802.17 ; R11.2@6260.83,9911.42 R12.1@6260.83,9991.14
  Top Layer w59.06: R18.2@6053.15,9261.81 6053.15,9340.55 6112.2,9399.61 6112.2,9538.98 BATTERY.1@6003.94,9647.24 6003.94,9816.93 6002.95,9817.91 6077.76,9892.72 R11.2@6246.06,9892.72
DAC_MISO: U6.22 U7.10 | length 268.7
  Top Layer w7.87: U7.10@6775.1,7918.31 6775.1,7866.63 6846.46,7795.28 U6.22@6962.6,7795.28
DAC_MOSI: U6.21 U7.9 | length 232.3
  Top Layer w7.87: U7.9@6800.1,7918.31 6800.1,7863.9 6837.23,7826.77 U6.21@6962.6,7826.77
DAC_S\S\: U6.20 U7.7 | length 298
  Top Layer w7.87: U7.7@6775.1,7731.3 6775.59,7731.79 v1(6775.59,7830.71) ; v1(6838.58,7858.27) U6.20@6962.6,7858.27
  Bottom Layer w7.87: v1(6775.59,7830.71) 6803.15,7858.27 v1(6838.58,7858.27)
DAC_SCK: U6.23 U7.8 | length 176
  Top Layer w7.87: U7.8@6800.1,7731.3 6837.6,7731.3 6870.08,7763.78 U6.23@6962.6,7763.78
DTR: C24.1 FTDI.1 | length 245.9
  Top Layer w7.87: C24.1@9133.86,7452.76 9204.72,7381.89 FTDI.1@9350.39,7381.89
F_SYNC: pad.0@8779.53,7795.28 U4.6 U5.3 U5.5 U5.12 U9.3 U9.5 U9.12 | length 1072.8
  Top Layer w7.87: U9.3@8057.09,7899.61 8017.72,7899.61 8011.81,7893.7 8011.81,7854.33 8017.72,7848.43 U9.5@8057.09,7848.43 8175.2,7848.43 8226.38,7899.61 U9.12@8281.5,7899.61 v1(8336.61,7899.61) ; U5.3@8431.1,7899.61 v1(8385.83,7899.61) 8385.83,7854.33 8391.73,7848.43 U5.5@8431.1,7848.43 8549.21,7848.43 8600.39,7899.61 U5.12@8655.51,7899.61 8714.57,7899.61 8738.19,7875.98 U4.6@8761.81,7875.98 8761.81,7812.99 pad.0@8779.53,7795.28
  Bottom Layer w7.87: v1(8336.61,7899.61) v1(8385.83,7899.61)
GND: 3V3_EXT.2 BATTERY.2 C1_X+.2 C1_X-.2 C1_Y+.2 C1_Y-.2 C1_Z+.2 C1_Z-.2 C2_X+.2 C2_X-.2 C2_Y+.2 C2_Y-.2 C2_Z+.2 C2_Z-.2 C4_X+.2 C4_X-.2 C4_Y+.2 C4_Y-.2 C4_Z+.2 C4_Z-.2 C5_X+.2 C5_X-.2 C5_Y+.2 C5_Y-.2 C5_Z+.2 C5_Z-.2 C6_X+.2 C6_X-.2 C6_Y+.2 C6_Y-.2 C6_Z+.2 C6_Z-.2 C7_X+.2 C7_X-.2 C7_Y+.2 C7_Y-.2 C7_Z+.2 C7_Z-.2 C8_X+.1 C8_X-.1 C8_Y+.1 C8_Y-.1 C8_Z+.1 C8_Z-.1 C10.2 C12.1 C13_X+.2 C13_X-.2 C13_Y+.2 C13_Y-.2 C13_Z+.2 C13_Z-.2 C17.1 C18.1 C19.2 C20.2 C22.1 C23.2 C26.1 C36.1 C37.1 C38.1 C39.1 C40.1 C41.1 C42.1 C43.1 FLATSAT.6 FLATSAT.8 FLATSAT.10 FLATSAT.12 FLATSAT.14 FLATSAT.16 FTDI.5 FTDI.6 LOAD.2 pad.0@8779.53,7637.8 PANEL_X+.2 PANEL_X-.2 PANEL_Y+.2 PANEL_Y-.2 PANEL_Z+.2 PANEL_Z-.2 PDI.6 R3_X+.1 R3_X-.1 R3_Y+.1 R3_Y-.1 R3_Z+.1 R3_Z-.1 R6_X+.1 R6_X-.1 R6_Y+.1 R6_Y-.1 R6_Z+.1 R6_Z-.1 R13.2 R14.1 R17.1 RESET.1 SHUTDOWN_X+.2 SHUTDOWN_X-.2 SHUTDOWN_Y+.2 SHUTDOWN_Y-.2 SHUTDOWN_Z+.2 SHUTDOWN_Z-.2 U1_X+.4 U1_X+.8 U1_X-.4 U1_X-.8 U1_Y+.4 U1_Y+.8 U1_Y-.4 U1_Y-.8 U1_Z+.4 U1_Z+.8 U1_Z-.4 U1_Z-.8 U4.2 U4.4 U5.7 U5.8 U5.9 U6.14 U6.24 U6.34 U6.44 U6.52 U6.60 U7.1 U8.1 U8.2 U8_X+.1 U8_X+.2 U8_X-.1 U8_X-.2 U8_Y+.1 U8_Y+.2 U8_Y-.1 U8_Y-.2 U8_Z+.1 U8_Z+.2 U8_Z-.1 U8_Z-.2 U9.7 U9.8 U9.9 U10.2 U11.1 U11.2 | length 6262.6
  Top Layer w7.87: v1(6201.77,9607.28) C19.2@6252.95,9607.28 ; U11.1@6238.19,9155.51 6277.56,9155.51 v1(6279.53,9153.54) ; U11.2@6238.19,9192.91 v1(6279.53,9192.91) ; v1(6260.83,10040.35) R13.2@6260.83,10089.57 ; v1(6270.67,9666.34) 6272.64,9668.31 U8.1@6272.64,9707.68 ; v1(6310.04,9666.34) U8.2@6310.04,9707.68 ; v1(6338.58,9104.33) C20.2@6338.58,9155.51 ; v1(6456.69,8472.44) R3_Z-.1@6456.69,8501.97 ; C17.1@6555.12,7834.65 v1(6602.36,7834.65) ; U7.1@6625.1,7731.3 v1(6625.1,7794.19) ; v1(6629.92,7576.77) C36.1@6677.17,7576.77 ; v1(6781.5,8149.61) U10.2@6781.5,8187.01 v1(6781.5,8228.35) ; v1(6818.9,8230.32) C37.1@6818.9,8277.56 ; U8_Z-.2@6824.8,8641.73 v1(6854.33,8641.73) ; U8_Z-.1@6824.8,8677.17 v1(6854.33,8677.17) ; C4_Z-.2@6917.32,8537.4 v1(6917.32,8566.93) ; U6.24@6962.6,7732.28 v1(7011.81,7732.28) ; U6.34@7059.06,7415.35 v1(7059.06,7468.5) ; U6.44@7374.02,7415.35 v1(7374.02,7468.5) ; v1(7511.81,7826.77) U6.60@7564.96,7826.77 ; v1(7515.75,7574.8) U6.52@7564.96,7574.8 ; v1(7637.8,8472.44) R3_Y-.1@7637.8,8501.97 ; v1(8003.94,7797.24) U9.7@8057.09,7797.24 ; U8_Y-.2@8005.91,8641.73 v1(8035.43,8641.73) ; U8_Y-.1@8005.91,8677.17 v1(8035.43,8677.17) ; C4_Y-.2@8098.43,8537.4 v1(8098.43,8566.93) ; C12.1@8200.79,8031.5 v1(8200.79,8078.74) ; v1(8228.35,7797.24) U9.8@8281.5,7797.24 ; v1(8228.35,7822.83) U9.9@8281.5,7822.83 ; v1(8377.95,7797.24) U5.7@8431.1,7797.24 ; RESET.1@8561.02,7352.36 v1(8622.05,7352.36) ; C18.1@8574.8,8031.5 v1(8574.8,8078.74) ; v1(8602.36,7797.24) U5.8@8655.51,7797.24 ; v1(8602.36,7822.83) U5.9@8655.51,7822.83 ; v1(8728.35,7948.82) 8730.31,7950.79 U4.4@8761.81,7950.79 ; v1(8818.9,8472.44) R3_X-.1@8818.9,8501.97 ; v1(8822.83,7909.45) 8826.77,7913.39 U4.2@8856.3,7913.39 ; v1(8830.17,8078.74) 8828.74,8080.17 8828.74,8075.76 8866.14,8038.36 C10.2@8866.14,8031.5 ; v1(8858.27,7352.36) RESET.1@8919.29,7352.36 ; U8_X-.2@9187.01,8641.73 v1(9216.54,8641.73) ; U8_X-.1@9187.01,8677.17 v1(9216.54,8677.17) ; C4_X-.2@9279.53,8537.4 v1(9279.53,8566.93) ; SHUTDOWN_Z-.2@9488.19,7657.48 v1(9547.24,7657.48) ; SHUTDOWN_Y-.2@9488.19,7755.91 v1(9547.24,7755.91) ; SHUTDOWN_X-.2@9488.19,7854.33 v1(9547.24,7854.33) ; SHUTDOWN_Z+.2@9488.19,7952.76 v1(9547.24,7952.76) ; SHUTDOWN_Y+.2@9488.19,8051.18 v1(9547.24,8051.18) ; SHUTDOWN_X+.2@9488.19,8149.61 v1(9547.24,8149.61) ; v1(10000,8472.44) R3_Z+.1@10000,8501.97 ; U8_Z+.2@10368.11,8641.73 v1(10397.64,8641.73) ; U8_Z+.1@10368.11,8677.17 v1(10397.64,8677.17) ; C4_Z+.2@10460.63,8537.4 v1(10460.63,8566.93) ; v1(11181.1,8472.44) R3_Y+.1@11181.1,8501.97 ; U8_Y+.2@11549.21,8641.73 v1(11578.74,8641.73) ; U8_Y+.1@11549.21,8677.17 v1(11578.74,8677.17) ; C4_Y+.2@11641.73,8537.4 v1(11641.73,8566.93) ; v1(12362.2,8472.44) R3_X+.1@12362.2,8501.97 ; U8_X+.2@12730.32,8641.73 v1(12759.84,8641.73) ; U8_X+.1@12730.32,8677.17 v1(12759.84,8677.17) ; C4_X+.2@12822.83,8537.4 v1(12822.83,8566.93)
  Top Layer w31.5: v2(6476.38,8842.52) C8_Z-.1@6476.38,8889.76 ; C5_Z-.2@6500,9240.16 v2(6547.24,9240.16) ; R6_Z-.1@6779.53,8972.44 U1_Z-.4@6779.53,9112.2 ; U1_Z-.4@6779.53,9149.61 v2(6779.53,9196.85) ; C1_Z-.2@6885.83,8799.21 v2(6933.07,8799.21) ; C2_Z-.2@6885.83,8944.88 v2(6933.07,8944.88) ; C6_Z-.2@7062.99,9389.76 v2(7110.24,9389.76) ; C7_Z-.2@7062.99,9566.93 v2(7110.24,9566.93) ; C13_Z-.2@7062.99,9744.09 v2(7110.24,9744.09) ; v2(7657.48,8842.52) C8_Y-.1@7657.48,8889.76 ; C5_Y-.2@7681.1,9240.16 v2(7728.35,9240.16) ; R6_Y-.1@7960.63,8972.44 U1_Y-.4@7960.63,9112.2 ; U1_Y-.4@7960.63,9149.61 v2(7960.63,9196.85) ; C1_Y-.2@8066.93,8799.21 v2(8114.17,8799.21) ; C2_Y-.2@8066.93,8944.88 v2(8114.17,8944.88) ; C6_Y-.2@8244.09,9389.76 v2(8291.34,9389.76) ; C7_Y-.2@8244.09,9566.93 v2(8291.34,9566.93) ; C13_Y-.2@8244.09,9744.09 v2(8291.34,9744.09) ; v2(8838.58,8842.52) C8_X-.1@8838.58,8889.76 ; C5_X-.2@8862.2,9240.16 v2(8909.45,9240.16) ; R6_X-.1@9141.73,8972.44 U1_X-.4@9141.73,9112.2 ; U1_X-.4@9141.73,9149.61 v2(9141.73,9196.85) ; C1_X-.2@9248.03,8799.21 v2(9295.28,8799.21) ; C2_X-.2@9248.03,8944.88 v2(9295.28,8944.88) ; C6_X-.2@9425.2,9389.76 v2(9472.44,9389.76) ; C7_X-.2@9425.2,9566.93 v2(9472.44,9566.93) ; C13_X-.2@9425.2,9744.09 v2(9472.44,9744.09) ; v2(10019.68,8842.52) C8_Z+.1@10019.68,8889.76 ; C5_Z+.2@10043.31,9240.16 v2(10090.55,9240.16) ; R6_Z+.1@10322.83,8972.44 U1_Z+.4@10322.83,9112.2 ; U1_Z+.4@10322.83,9149.61 v2(10322.83,9196.85) ; C1_Z+.2@10429.13,8799.21 v2(10476.38,8799.21) ; C2_Z+.2@10429.13,8944.88 v2(10476.38,8944.88) ; C6_Z+.2@10606.3,9389.76 v2(10653.54,9389.76) ; C7_Z+.2@10606.3,9566.93 v2(10653.54,9566.93) ; C13_Z+.2@10606.3,9744.09 v2(10653.54,9744.09) ; v2(11200.79,8842.52) C8_Y+.1@11200.79,8889.76 ; C5_Y+.2@11224.41,9240.16 v2(11271.65,9240.16) ; R6_Y+.1@11503.94,8972.44 U1_Y+.4@11503.94,9112.2 ; U1_Y+.4@11503.94,9149.61 v2(11503.94,9196.85) ; C1_Y+.2@11610.24,8799.21 v2(11657.48,8799.21) ; C2_Y+.2@11610.24,8944.88 v2(11657.48,8944.88) ; C6_Y+.2@11787.4,9389.76 v2(11834.65,9389.76) ; C7_Y+.2@11787.4,9566.93 v2(11834.65,9566.93) ; C13_Y+.2@11787.4,9744.09 v2(11834.65,9744.09) ; v2(12381.89,8842.52) C8_X+.1@12381.89,8889.76 ; C5_X+.2@12405.51,9240.16 v2(12452.76,9240.16) ; R6_X+.1@12685.04,8972.44 U1_X+.4@12685.04,9112.2 ; U1_X+.4@12685.04,9149.61 v2(12685.04,9196.85) ; C1_X+.2@12791.34,8799.21 v2(12838.58,8799.21) ; C2_X+.2@12791.34,8944.88 v2(12838.58,8944.88) ; C6_X+.2@12968.5,9389.76 v2(13015.75,9389.76) ; C7_X+.2@12968.5,9566.93 v2(13015.75,9566.93) ; C13_X+.2@12968.5,9744.09 v2(13015.75,9744.09)
  Bottom Layer w7.87: C40.1@7133.86,7696.85 v1(7185.04,7696.85) ; C39.1@7133.86,7913.39 v1(7185.04,7913.39) ; C41.1@7143.7,7519.69 v1(7194.88,7519.69) ; v1(7332.68,7618.11) C43.1@7383.86,7618.11 ; v1(7332.68,7834.65) C38.1@7383.86,7834.65 ; v1(7332.68,7933.07) C26.1@7383.86,7933.07 ; C42.1@7458.66,7519.69 7458.66,7564.96 v1(7460.63,7566.93) ; v1(7618.11,7726.38) C23.2@7669.29,7726.38 ; v1(7618.11,7824.8) C22.1@7669.29,7824.8 ; v1(8728.35,8074.8) 8763.78,8074.8 R14.1@8779.53,8090.55 ; R17.1@9822.83,8897.64 v1(9822.83,8944.88)
  other v3: 6661.42,9387.8 6779.53,9387.8 6897.64,9387.8 7842.52,9387.8 7960.63,9387.8 8078.74,9387.8 9023.62,9387.8 9141.73,9387.8 9259.84,9387.8 10204.72,9387.8 10322.83,9387.8 10440.94,9387.8 11385.83,9387.8 11503.94,9387.8 11622.05,9387.8 12566.93,9387.8 12685.04,9387.8 12803.15,9387.8 6661.42,9466.54 6779.53,9466.54 6897.64,9466.54 7842.52,9466.54 7960.63,9466.54 8078.74,9466.54 9023.62,9466.54 9141.73,9466.54 9259.84,9466.54 10204.72,9466.54 10322.83,9466.54 10440.94,9466.54 11385.83,9466.54 11503.94,9466.54 11622.05,9466.54 12566.93,9466.54 12685.04,9466.54 12803.15,9466.54 6661.42,9545.28 6779.53,9545.28 6897.64,9545.28 7842.52,9545.28 7960.63,9545.28 8078.74,9545.28 9023.62,9545.28 9141.73,9545.28 9259.84,9545.28 10204.72,9545.28 10322.83,9545.28 10440.94,9545.28 11385.83,9545.28 11503.94,9545.28 11622.05,9545.28 12566.93,9545.28 12685.04,9545.28 12803.15,9545.28
I2C_SCL: FLATSAT.7 R20.2 U6.37 | length 3663
  Top Layer w7.87: v1(7153.54,7362.2) U6.37@7153.54,7415.35 ; v1(10492.13,7568.9) R20.2@10492.13,7618.11
  Bottom Layer w7.87: v1(7153.54,7362.2) 7224.41,7291.34 10347.24,7291.34 FLATSAT.7@10437.8,7381.89 10492.13,7436.22 v1(10492.13,7568.9)
I2C_SDA: FLATSAT.9 R19.2 U6.36 | length 3806.9
  Top Layer w7.87: v1(7122.05,7362.2) U6.36@7122.05,7415.35 ; v1(10590.55,7568.9) R19.2@10590.55,7618.11
  Bottom Layer w7.87: v1(7122.05,7362.2) 7208.66,7275.59 10431.5,7275.59 FLATSAT.9@10537.8,7381.89 10590.55,7434.65 v1(10590.55,7568.9)
I_SET_X+: R7_X+.2 U7.2 | length 6826.1
  Top Layer w7.87: v1(6647.54,7669.29) 6650.1,7671.85 U7.2@6650.1,7731.3 ; v1(7586.61,8157.48) 7598.43,8169.29 9089.59,8169.29 9136.83,8216.54 10251.12,8216.54 10298.36,8263.78 11412.65,8263.78 11459.9,8311.02 12386.11,8311.02 12421.26,8346.18 v1(12421.26,8665.35) ; v1(12503.94,8850.39) R7_X+.2@12503.94,8879.92
  Bottom Layer w7.87: v1(6647.54,7669.29) 6647.54,7651.67 6675.2,7624.02 6794.54,7624.02 6901.57,7731.05 6901.57,7883.36 7175.7,8157.48 v1(7586.61,8157.48) ; v1(12421.26,8665.35) 12503.94,8748.03 v1(12503.94,8850.39) v1@12503.94,8854.33
I_SET_X-: R7_X-.2 U7.13 | length 2967.2
  Top Layer w7.87: U7.13@6700.1,7918.31 6700.1,7986.91 v1(6701.38,7988.19) ; v1(7468.5,8299.21) 7480.31,8311.02 8842.8,8311.02 8877.95,8346.18 8877.95,8389.76 v1(8877.95,8665.35) ; v1(8960.63,8850.39) R7_X-.2@8960.63,8879.92
  Bottom Layer w7.87: v1(6701.38,7988.19) 6939.59,7988.19 7250.62,8299.21 v1(7468.5,8299.21) ; v1(8877.95,8665.35) 8960.63,8748.03 v1(8960.63,8850.39) v1@8960.63,8854.33
I_SET_Y+: R7_Y+.2 U7.3 | length 5601.1
  Top Layer w7.87: v1(6675.1,7669.29) U7.3@6675.1,7731.3 ; v1(7547.24,8204.72) 7559.06,8216.54 9070.02,8216.54 9117.26,8263.78 10231.55,8263.78 10278.79,8311.02 11122.05,8311.02 11205,8311.02 11240.16,8346.18 v1(11240.16,8665.35) ; v1(11322.83,8850.39) R7_Y+.2@11322.83,8879.92
  Bottom Layer w7.87: v1(6675.1,7669.29) 6675.1,7655.61 6690.94,7639.76 6788.02,7639.76 6885.83,7737.57 6885.83,7889.88 7200.67,8204.72 v1(7547.24,8204.72) ; v1(11240.16,8665.35) 11322.83,8748.03 v1(11322.83,8850.39) v1@11322.83,8854.33
I_SET_Y-: R7_Y-.2 U7.14 | length 1772.1
  Top Layer w7.87: v1(6673.82,7988.19) 6675.1,7986.91 U7.14@6675.1,7918.31 ; v1(7429.13,8346.46) 7440.94,8358.27 7641.73,8358.27 7696.85,8413.39 v1(7696.85,8661.42) ; v1(7779.53,8850.39) R7_Y-.2@7779.53,8879.92
  Bottom Layer w7.87: v1(6673.82,7988.19) 6673.82,7991.25 6692.41,8009.84 6938.98,8009.84 7275.59,8346.46 v1(7429.13,8346.46) ; v1(7696.85,8661.42) 7779.53,8744.09 v1(7779.53,8850.39)